# EAGLE board Adafruit-FunHouse (EAGLE 9.6.2)
REV: C
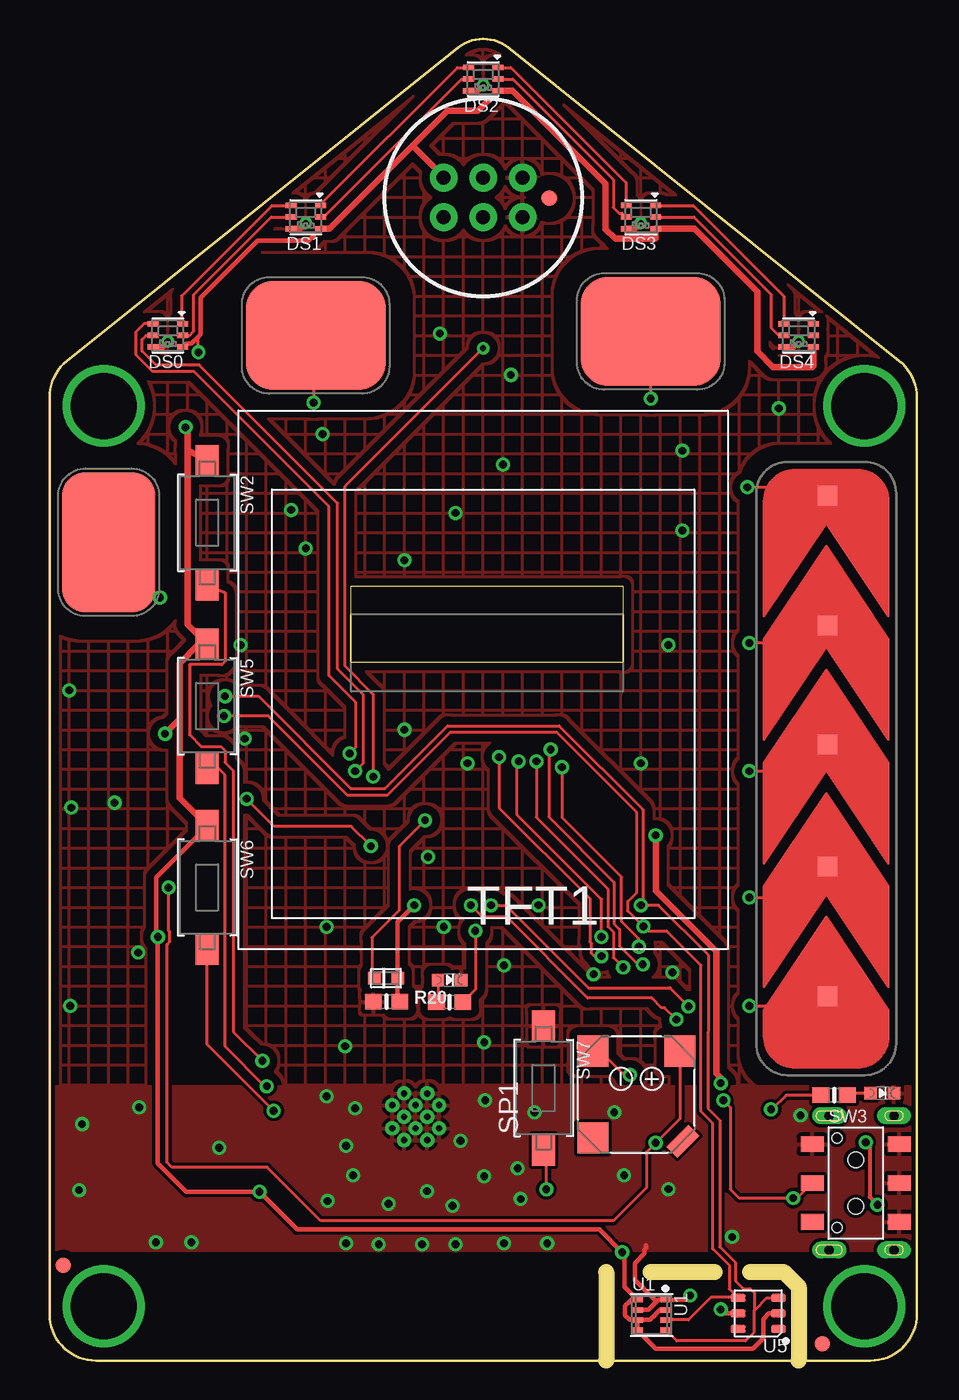
[diagram p0: board, top side]
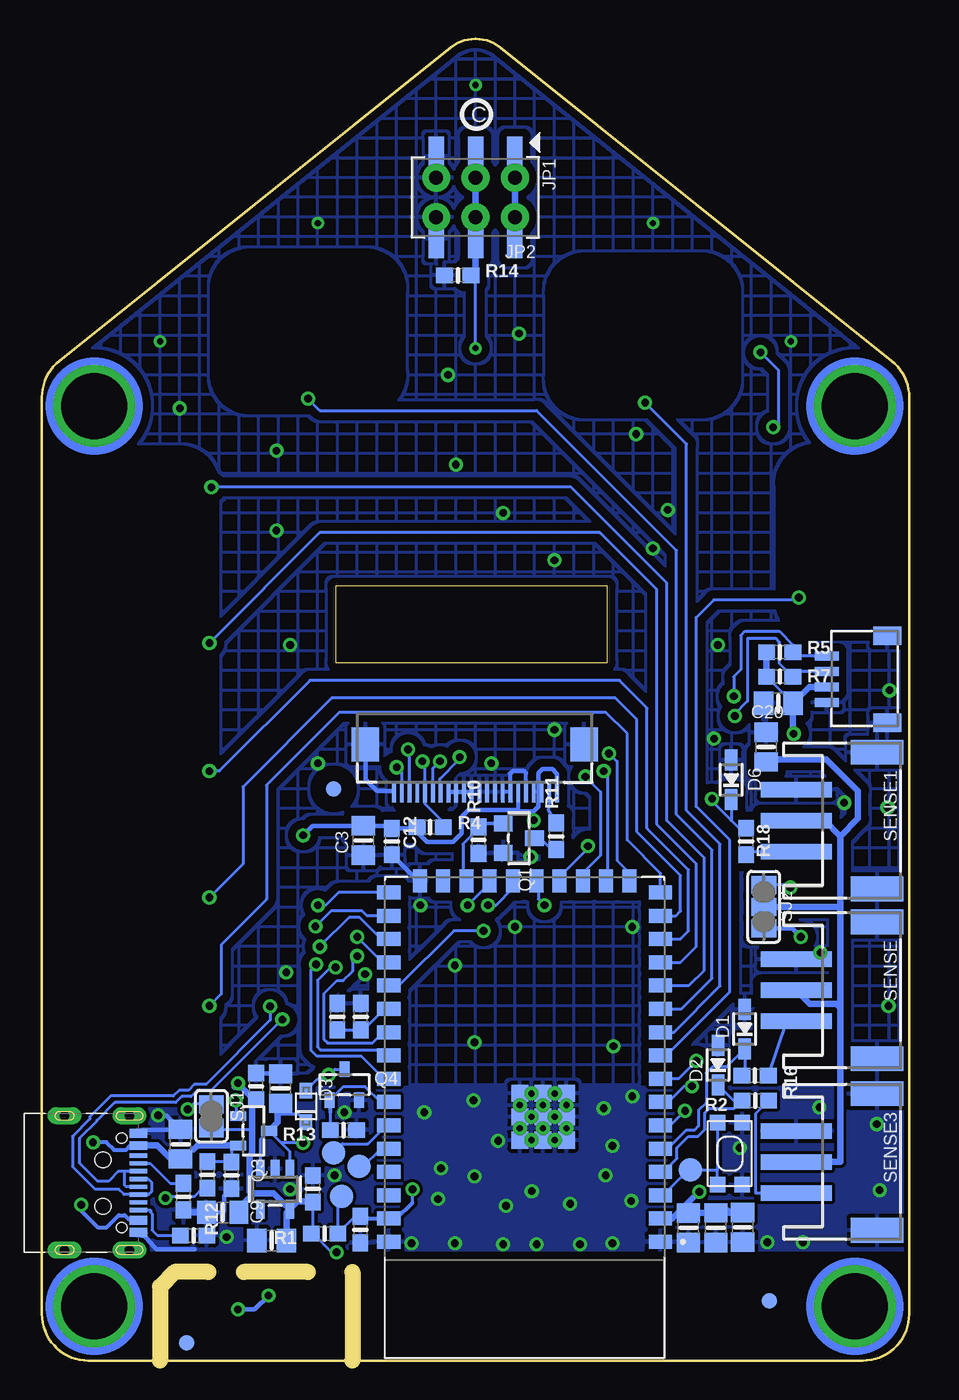
[diagram p1: board, bottom side, seen from below]

Size 55.88 x 85.15 mm. Coordinates in mm from the lower left corner, seen from the top.
Outline: 54.75,64.4 29.53,84.59 arc77 26.35,84.59 1.13,64.4 arc51 0,62.06 0,3 arc90 3,0 52.88,0 arc90 55.88,3 55.88,62.06 arc51 54.75,64.4
Outline: 19.43,49.91 36.96,49.91 36.96,44.96 19.43,44.96 19.43,49.91
Copper layers (1*16): Top 0.035mm / dielectric 1.5mm / Bottom 0.035mm
Design rules "adafruit *": minimum track width 8mil, minimum drill 15.5mil, track to track 8mil, track to pad 8mil, pad to pad 8mil, via to via 8mil, smd to smd 8mil, copper to edge 10mil, drill to drill 8mil, minimum pad ring 10mil, minimum via ring 8mil, stop-mask expansion 2mil, vias tented up to drill 20mil, thermal gap 10mil
Net classes: 1 power: width 0.305 mm; 2 lowpower: width 0.305 mm, drill 0.483 mm
Milling: 5 lines

## Footprints (pad centres in the part's own frame; a part is rotated, then mirrored left to right if it is on the bottom)
0805-NO = smd 1.24 x 1.5: 1 -0.95,0; 2 0.95,0
0603-NO = smd 1.075 x 1: 1 -0.85,0; 2 0.85,0
0805_10MGAP = smd 1.2 x 1.5: 1 -1.05,0; 2 1.05,0
JST_SH4 = smd 0.6 x 1.55: 1 -1.5,2.514; 2 -0.5,2.514; 3 0.5,2.514; 4 1.5,2.514 | smd 1.2 x 1.8: MT1 -2.8,-1.386; MT2 2.8,-1.386
SOD-323 = smd 1.35 x 0.8: A 1.27,0; C -1.27,0
SOD-323F = smd 1 x 0.8: A -1,0; C 1,0
APA102_2020 = smd 0.7 x 0.35: 1 -0.95,-0.75; 2 -0.95,0; 3 -0.95,0.75; 4 0.95,0.75; 5 0.95,0; 6 0.95,-0.75
FIDUCIAL_1MM = smd 1 x 1: 1 0,0
2X03_SMT_4UCON_14113 = smd 1 x 2.5: 1 -2.54,-2.665; 2 -2.54,2.665; 3 0,-2.665; 4 0,2.665; 5 2.54,-2.665; 6 2.54,2.665
2X03_SMTTHM = smd 1 x 2.5: 1 -2.54,-2.665; 2 -2.54,2.665; 3 0,-2.665; 4 0,2.665; 5 2.54,-2.665; 6 2.54,2.665 | drill 0.9 pad 1.778: T1 -2.54,-1.27; T2 -2.54,1.27; T3 0,-1.27; T4 0,1.27; T5 2.54,-1.27; T6 2.54,1.27
CHIPLED_0603_NOOUTLINE = smd 0.8 x 0.8: A 0,-0.75; C 0,0.75
SOT23-WIDE = smd 1 x 1.2: 1 -0.95,-1; 2 0.95,-1; 3 0,1
SOT23-R = smd 0.635 x 1.016: 1 -0.95,-1; 2 0.95,-1; 3 0,1
JSTPH3 = smd 1 x 4.6: 1 -2,-2.7; 2 0,-2.7; 3 2,-2.7 | smd 1.6 x 3.4: NC1 -4.4,2.5; NC2 4.4,2.5
SOLDERJUMPER_CLOSEDWIRE = smd 1.168 x 1.6: 1 -0.762,0; 2 0.762,0 | smd 0.635 x 0.203: WIRE 0,0
SOLDERJUMPER_2WAY_OPEN_NOPASTE = smd 1.168 x 1.6: 1 -1.397,0; 2 0,0; 3 1.397,0
BUZZER_SMT_7.5MM = smd 2 x 2: + 2.8,-2.8; - 2.8,2.8; MT2 -2.8,2.8 | smd 2 x 1 rotated 135: MT -3,-3
TACTILE_3X6MM = smd 2 x 1.5: P$1 -4,0; P$2 4,0
EG1390 = smd 1 x 1.5: O1 -2.5,2.8; O2 -2.5,-2.8; P1 0,2.8; P2 0,-2.8; S1 2.5,2.8; S2 2.5,-2.8 | hole 1: 1.5,0; -1.5,0
KMR2 = smd 1 x 1: 1 2,0.8; 2 2,-0.8; 3 -2,0.8; 4 -2,-0.8
TFT_1.54IN_240X240_22PIN = smd 0.25 x 1.4 bottom: 1 5.25,2.722; 2 4.75,2.722; 3 4.25,2.722; 4 3.75,2.722; 5 3.25,2.722; 6 2.75,2.722; 7 2.25,2.722; 8 1.75,2.722; 9 1.25,2.722; 10 0.75,2.722; 11 0.25,2.722; 12 -0.25,2.722; 13 -0.75,2.722; 14 -1.25,2.722; 15 -1.75,2.722; 16 -2.25,2.722; 17 -2.75,2.722; 18 -3.25,2.722; 19 -3.75,2.722; 20 -4.25,2.722; 21 -4.75,2.722; 22 -5.25,2.722 | smd 1.8 x 2.2 bottom: SUPPORT1 7,-0.328; SUPPORT2 -7.1,-0.328
TESTPOINT_ROUND_1.5MM_NO = smd 1.5 x 1.5: P$1 0,0
SMT_NUT_3MM = drill 4.25 pad 4.572: P$1 0,0
BMX280_COMBO = smd 0.725 x 0.35: 1 0.925,0.975; 2 0.925,0.325; 3 0.925,-0.325; 4 0.925,-0.975; 5 -0.925,-0.975; 6 -0.925,-0.325; 7 -0.925,0.325; 8 -0.925,0.975
ALS-PT19-315C = smd 0.8 x 0.8: C -0.75,0; E 0.75,0
MODULE_ESP32-S2-WROVER = smd 1.5 x 0.9: 1 -8.75,8; 2 -8.75,6.5; 3 -8.75,5; 4 -8.75,3.5; 5 -8.75,2; 6 -8.75,0.5; 7 -8.75,-1; 8 -8.75,-2.5; 9 -8.75,-4; 10 -8.75,-5.5; 11 -8.75,-7; 12 -8.75,-8.5; 13 -8.75,-10; 14 -8.75,-11.5; 15 -8.75,-13; 16 -8.75,-14.5; 27 8.75,-14.5; 28 8.75,-13; 29 8.75,-11.5; 30 8.75,-10; 31 8.75,-8.5; 32 8.75,-7; 33 8.75,-5.5; 34 8.75,-4; 35 8.75,-2.5; 36 8.75,-1; 37 8.75,0.5; 38 8.75,2; 39 8.75,3.5; 40 8.75,5; 41 8.75,6.5; 42 8.75,8 | smd 0.9 x 1.5: 17 -6.75,-15.25; 18 -5.25,-15.25; 19 -3.75,-15.25; 20 -2.25,-15.25; 21 -0.75,-15.25; 22 0.75,-15.25; 23 2.25,-15.25; 24 3.75,-15.25; 25 5.25,-15.25; 26 6.75,-15.25 | smd 1.1 x 1.1: 43_1 -2.69,1.45; 43_2 -1.19,1.45; 43_3 0.31,1.45; 43_4 -2.69,-0.05; 43_5 -1.19,-0.05; 43_6 0.31,-0.05; 43_7 -2.69,-1.55; 43_8 -1.19,-1.55; 43_9 0.31,-1.55 | drill 0.4: 43_10 -1.94,1.45; 43_11 -0.44,1.45; 43_12 -2.69,0.7; 43_13 -1.19,0.7; 43_14 0.31,0.7; 43_15 -1.94,-0.05; 43_16 -0.44,-0.05; 43_17 -2.69,-0.8; 43_18 -1.19,-0.8; 43_19 0.31,-0.8; 43_20 -1.94,-1.55; 43_21 -0.44,-1.55
SOT23-5 = smd 0.55 x 1.2: 1 -0.95,-1.3; 2 0,-1.3; 3 0.95,-1.3; 4 0.95,1.3; 5 -0.95,1.3
SNR6-1.0-3X3X1MM = smd 0.95 x 0.5: 1 -1.3,1; 2 -1.3,0; 3 -1.3,-1; 4 1.3,-1; 5 1.3,0; 6 1.3,1
CAPTOUCH_6X9MM = smd 9 x 6: P$1 0,0
CAPTOUCH_7X9MM = smd 9 x 7: P$1 0,0
USB_C_CUSB31-CFM2AX-01-X = smd 0.575 x 1.15: A1B12 -3.2,3.545; A4B9 -2.4,3.545; B1A12 3.2,3.545; B4A9 2.4,3.545 | smd 0.275 x 1.15: A5 -1.25,3.545; A6 -0.25,3.545; A7 0.25,3.545; A8 1.25,3.545; B5 1.75,3.545; B6 0.75,3.545; B7 -0.75,3.545; B8 -1.75,3.545 | drill 0.6 pad 1 long: M1 -4.32,2.97; M2 4.32,2.97; M3 -4.32,-1.21; M4 4.32,-1.21 | hole 0.65: 2.89,2.47; -2.89,2.47
CAPTOUCH_5SLIDER = smd 1.27 x 1.27: P$1 0.08,-16.42; P$2 0.08,-8.07; P$3 0.08,-0.18; P$4 0.08,7.44; P$5 0.08,15.83

## Placement (x,y rotation side)
C1  10uF  [0805-NO]  46.95,13.95 90 bottom
C2  0.1uF  [0603-NO]  42.08,17.67 90 bottom
C3  10µF  [0805-NO]  35.17,33.5 270 bottom
C4  10µF  [0805-NO]  12.46,8.57 270 bottom
C5  0.1uF  [0603-NO]  38.42,11.07 90 bottom
C6  1uF  [0603-NO]  35.34,22.16 90 bottom
C7  10µF  [0805-NO]  8.43,42.35 180 bottom
C9  10uF/10V+  [0805_10MGAP]  44.23,9.55 0 bottom
C10  10µF  [0805-NO]  10.73,8.59 270 bottom
C11  10µF  [0805-NO]  40.5,17.53 90 bottom
C12  1uF  [0603-NO]  33.32,33.44 270 bottom
C13  10µF  [0805-NO]  14.23,8.56 270 bottom
C14  1uF  [0603-NO]  35.36,8.45 270 bottom
C15  0.1uF  [0603-NO]  43.67,11.94 270 bottom
C17  10µF  [0805-NO]  41.07,7.75 180 bottom
C20  10uF  [0805-NO]  9.22,39.52 90 bottom
CONN1  STEMMA_I2C_QT  [JST_SH4]  2.81,43.89 90 bottom
D1  3.6V  [SOD-323]  10.6,21.36 90 bottom
D2  3.6V  [SOD-323]  12.32,19.05 90 bottom
D3  1N4148  [SOD-323F]  38.86,16.38 270 bottom
D6  3.6V  [SOD-323]  11.47,37.41 90 bottom
DS0  APA102-2020  [APA102_2020]  7.62,66.04 180 top
DS1  APA102-2020  [APA102_2020]  16.51,73.66 180 top
DS2  APA102-2020  [APA102_2020]  27.94,82.55 180 top
DS3  APA102-2020  [APA102_2020]  38.1,73.66 180 top
DS4  APA102-2020  [APA102_2020]  48.26,66.04 180 top
FID1  FIDUCIAL_1MM  [FIDUCIAL_1MM]  49.78,1.08 0 top
FID2  FIDUCIAL_1MM  [FIDUCIAL_1MM]  32.19,74.87 0 top
FID3  FIDUCIAL_1MM  [FIDUCIAL_1MM]  0.89,6.16 0 top
FID4  FIDUCIAL_1MM  [FIDUCIAL_1MM]  9.02,3.87 0 bottom
FID5  FIDUCIAL_1MM  [FIDUCIAL_1MM]  46.55,1.14 0 bottom
FID6  FIDUCIAL_1MM  [FIDUCIAL_1MM]  37.08,36.83 0 bottom
JP1  2x3 SMT  [2X03_SMT_4UCON_14113]  27.94,74.93 180 bottom
JP2  [2X03_SMTTHM]  27.94,74.93 180 bottom
L  RED  [CHIPLED_0603_NOOUTLINE]  25.78,24.52 270 top
ON  GREEN  [CHIPLED_0603_NOOUTLINE]  53.66,17.23 270 top
Q1  BSS138  [SOT23-WIDE]  25.15,33.66 270 bottom
Q3  DMG3415U-7  [SOT23-R]  42.24,14.81 270 bottom
Q4  BSS138  [SOT23-R]  36.39,17.78 0 bottom
R1  10K  [0603-NO]  37.67,8.19 180 bottom
R2  1K  [0603-NO]  9.91,16.76 180 bottom
R3  5.1K  [0603-NO]  46.1,8.07 180 bottom
R4  10K  [0603-NO]  30.86,34.35 0 bottom
R5  10K  [0603-NO]  8.34,45.64 0 bottom
R6  47K  [0603-NO]  50.55,17.11 180 top
R7  10K  [0603-NO]  8.34,44.07 0 bottom
R8  5.1K  [0603-NO]  46.75,10.57 90 bottom
R9  10K  [0603-NO]  25.78,23.1 0 top
R10  10K  [0603-NO]  27.75,33.53 90 bottom
R11  100  [0603-NO]  22.73,33.78 90 bottom
R12  10K  [0603-NO]  45.21,11.98 270 bottom
R13  10K  [0603-NO]  36.45,14.86 180 bottom
R14  1Meg  [0603-NO]  29.08,69.91 0 bottom
R16  1K  [0603-NO]  9.93,18.35 180 bottom
R17  1Meg  [0603-NO]  36.86,22.16 270 bottom
R18  1K  [0603-NO]  10.5,33.45 90 bottom
R20  10K  [0603-NO]  21.72,23.11 0 top
SENSE  JST PH 3  [JSTPH3]  4.57,23.86 270 bottom
SENSE1  JST PH 3  [JSTPH3]  4.57,34.79 270 bottom
SENSE3  JST PH 3  [JSTPH3]  4.57,12.8 270 bottom
SJ1  [SOLDERJUMPER_CLOSEDWIRE]  44.96,15.75 270 bottom
SJ2  [SOLDERJUMPER_2WAY_OPEN_NOPASTE]  9.38,29.24 270 bottom
SP1  7.5mm SPK  [BUZZER_SMT_7.5MM]  37.81,17.14 90 top
SW2  FSM2JMTR  [TACTILE_3X6MM]  10.16,53.98 270 top
SW3  EG1390  [EG1390]  51.94,11.45 270 top
SW4  SPST_TACT-KMR2  [KMR2]  11.56,13.34 270 bottom
SW5  FSM2JMTR  [TACTILE_3X6MM]  10.16,42.16 270 top
SW6  FSM2JMTR  [TACTILE_3X6MM]  10.16,30.48 270 top
SW7  FSM2JMTR  [TACTILE_3X6MM]  31.83,17.57 270 top
TFT1  DISP_TFT_1.54IN_240X240_22P  [TFT_1.54IN_240X240_22PIN]  27.94,39.37 180 top
TP1  [TESTPOINT_ROUND_1.5MM_NO]  14.1,12.31 180 bottom
TP2  [TESTPOINT_ROUND_1.5MM_NO]  35.43,12.51 0 bottom
TP3  [TESTPOINT_ROUND_1.5MM_NO]  37.08,13.4 0 bottom
TP4  SEWTAP_SMTNUTM3  [SMT_NUT_3MM]  3.5,3.5 0 bottom
TP5  SEWTAP_SMTNUTM3  [SMT_NUT_3MM]  52.5,3.5 0 bottom
TP6  [TESTPOINT_ROUND_1.5MM_NO]  36.58,10.59 270 bottom
TP7  SEWTAP_SMTNUTM3  [SMT_NUT_3MM]  3.5,61.5 0 bottom
TP8  SEWTAP_SMTNUTM3  [SMT_NUT_3MM]  52.5,61.5 0 bottom
U1  DPS3  [BMX280_COMBO]  38.79,2.95 0 top
U2  ALS-PT19  [ALS-PT19-315C]  21.68,24.64 0 top
U3  ESP32-S2-MODULE_WROVER  [MODULE_ESP32-S2-WROVER]  24.78,15.66 180 bottom
U4  AP2112K-3.3  [SOT23-5]  40.85,11.05 180 bottom
U5  AHT20  [SNR6-1.0-3X3X1MM]  45.66,3.05 180 top
U$41  [PCBFEAT-REV-040]  27.88,80.26 0 bottom
U$45  [FUNHOUSE_FRONT]  0,0 0 top
U$69  [FUNHOUSE_BACK]  55.88,0 0 bottom
X1  CAPTOUCH_10MM  [CAPTOUCH_6X9MM]  3.81,52.72 90 top
X3  CAPTOUCH_10MM  [CAPTOUCH_7X9MM]  17.14,66.04 0 top
X4  USB C  [USB_C_CUSB31-CFM2AX-01-X]  53.2,11.46 270 bottom
X5  CAPTOUCH_10MM  [CAPTOUCH_7X9MM]  38.73,66.29 0 top
X6  CAPTOUCH_5SLIDER_10MM  [CAPTOUCH_5SLIDER]  50.04,39.89 0 top

## Library data of the parts
C1-C7 C9-C15 C17 C20 CONN1 D1 D2 D6 DS0 DS1-DS4 JP1 L ON Q1 Q3 Q4 R1-R14 R16-R18 R20 SJ1 SJ2 SP1 SW7 TP1-TP3 TP6 U2 U4 = microbuilder
D3 SW4 = adafruit
FID1-FID6 = microbuilder; BOM: EXCLUDE
JP2 SENSE SENSE1 SENSE3 SW2 SW3 SW5 SW6 TP4 TP5 TP7 TP8 X1 X3-X6 = adafruit_electromech
TFT1 = adafruit_display
U1 = adafruit_sensor
U3 = adafruit_wireless; AVAILABILITY: Warning; DESCRIPTION: WiFi 802.11b/g/n Transceiver Module 2.4GHz Antenna Not Included Surface Mount; DIGIKEY-PURCHASE-URL: https://snapeda.com/shop?store=DigiKey&id=4614060; MF: Espressif Systems; MP: ESP32-S2-WROVER; PACKAGE: VFQFN-56 Espressif Systems; PRICE: None
U5 = Longan-IC
U$41 = microbuilder; REV: C
U$45 U$69 = portal_silks

## Nets
3.3V: C2.1 C3.1 C4.1 C5.1 C7.1 C9.2 C10.1 C12.1 C13.1 C17.1 CONN1.2 DS0.3 DS1.3 DS2.3 DS3.3 DS4.3 JP1.1 JP1.2 JP2.1 JP2.2 JP2.T1 JP2.T2 R1.2 R4.1 R5.1 R7.1 SJ1.2 SJ2.3 SW2.P$1 SW5.P$1 SW6.P$1 TFT1.1 TFT1.3 TFT1.4 TFT1.6 U1.2 U1.5 U1.6 U1.8 U2.C U3.2 U4.5 U5.2
A0_JST: R18.1 SENSE1.3
A2_JST2: R2.1 SENSE3.3
AD0: D6.C R18.2 U3.20
AD1: D1.C R16.2 U3.5
AD1_JST: R16.1 SENSE.3
AD2: D2.C R2.2 U3.4
BOOT0: SW4.2 SW4.4 TP1.P$1 U3.3
BUTTON_DOWN: SW6.P$2 U3.6
BUTTON_SEL: SW5.P$2 U3.7
BUTTON_UP: SW2.P$2 U3.8
CC1: R8.2 X4.A5
CC2: R3.2 X4.B5
CT6: U3.9 X1.P$1
CT7: U3.10 X3.P$1
CT8: U3.11 X5.P$1
CT9: U3.12 X6.P$5
CT10: U3.13 X6.P$4
CT11: U3.14 X6.P$3
CT12: U3.15 X6.P$2
CT13: U3.16 X6.P$1
D+: U3.23 X4.A6 X4.B6
D-: U3.22 X4.A7 X4.B7
DS_CLK: DS0.5 U3.18
DS_DATA: DS0.6 U3.17
EN: Q3.1 R12.2 SW3.P2
GND [lowpower]: C1.2 C2.2 C3.2 C4.2 C5.2 C6.2 C7.2 C9.1 C10.2 C11.2 C12.2 C13.2 C14.2 C15.2 C17.2 C20.2 CONN1.1 CONN1.MT1 CONN1.MT2 D1.A D2.A D6.A DS0.4 DS1.4 DS2.4 DS3.4 DS4.4 JP1.5 JP1.6 JP2.5 JP2.6 JP2.T5 JP2.T6 L.C ON.C Q1.2 Q4.2 R3.1 R8.1 R10.1 R13.1 R14.1 R17.1 R20.1 SENSE1.1 SENSE1.NC1 SENSE1.NC2 SENSE3.1 SENSE3.NC1 SENSE3.NC2 SENSE.1 SENSE.NC1 SENSE.NC2 SW3.O1 SW3.O2 SW3.P1 SW3.S1 SW4.1 SW4.3 SW7.P$1 TFT1.5 TFT1.7 TFT1.8 TFT1.9 TFT1.10 TFT1.11 TFT1.12 TFT1.13 TFT1.14 TFT1.15 TFT1.22 TFT1.SUPPORT1 TFT1.SUPPORT2 U1.1 U1.7 U3.1 U3.26 U3.42 U3.43_1 U3.43_2 U3.43_3 U3.43_4 U3.43_5 U3.43_6 U3.43_7 U3.43_8 U3.43_9 U3.43_10 U3.43_11 U3.43_12 U3.43_13 U3.43_14 U3.43_15 U3.43_16 U3.43_17 U3.43_18 U3.43_19 U3.43_20 U3.43_21 U4.2 U5.5 X4.A1B12 X4.B1A12
IO38_DOUBLETAP: C6.1 R17.2 U3.32
LIGHT: R20.2 U2.E U3.21
MISO: R9.2 U3.31
MOSI: TFT1.21 U3.29
N$1: L.A R9.1
N$2: R6.2 SJ1.1
N$3: ON.A R6.1
N$5: D3.A Q4.3 SP1.-
N$10: DS0.1 DS1.6
N$11: DS0.2 DS1.5
N$12: DS1.1 DS2.6
N$14: DS1.2 DS2.5
N$15: DS2.1 DS3.6
N$17: DS2.2 DS3.5
N$24: DS3.1 DS4.6
N$25: DS3.2 DS4.5
N$99: Q1.3 R11.1
PIR_SENSE: JP1.3 JP1.4 JP2.3 JP2.4 JP2.T3 JP2.T4 R14.2 U3.19
RESET: C14.1 R1.1 SW7.P$2 TP6.P$1 U3.41
RXD0: TP2.P$1 U3.38
SCK: TFT1.17 U3.30
SCL: CONN1.4 R5.2 U1.4 U3.27 U5.3
SDA: CONN1.3 R7.2 U1.3 U3.28 U5.4
SPKR: Q4.1 R13.2 U3.36
TFT_CS: R4.2 TFT1.18 U3.34
TFT_DC: TFT1.16 U3.33
TFT_LEDK: R11.2 TFT1.2
TFT_LITE: Q1.1 R10.2 U3.24
TFT_RESET: TFT1.20 U3.35
TXD0: TP3.P$1 U3.37
VBUS: C1.1 C15.1 Q3.2 R12.1 X4.A4B9 X4.B4A9
VCC [power]: C20.1 SENSE1.2 SENSE3.2 SENSE.2 SJ2.2
VHIGH: C11.1 D3.C Q3.3 SJ2.1 SP1.+ U4.1 U4.3

## Tracks (layer width: path | path; a pad name or v marks a point on that pad's centre or on a via)
3.3V  (via drill 0.48, 0.5)
  Top 0.203: v9.59,64.96 9.59,65.91 9.56,65.94 | U2.C 20.77,24.8 20.77,27.25 22.54,29.03 22.54,33.15 v24.19,34.8
  Top 0.305: U1.6 U1.5 39.07,0.76 45.3,0.76 45.97,1.43 45.97,2.67 46.35,3.05 U5.2 | U1.6 38.69,2.62 38.99,2.92 38.99,2.94 39.32,3.27 U1.2 | U1.8 37.67,4.11 | 37.67,4.11 37.03,4.75 37.03,6.84 v36.89,6.99 35.42,8.46 15.94,8.46 v13.53,10.87 8.81,10.87 6.99,12.7 v6.99,27.3 6.86,27.43 6.86,31.11 10.16,34.42 SW6.P$1 | DS0.3 8.79,65.51 9.13,65.51 9.56,65.94 9.75,66.13 9.75,68.48 13.41,72.14 16.69,72.14 DS1.3 | U1.6 37.38,2.62 37.08,2.92 37.08,3.54 37.35,3.8 37.36,3.8 37.67,4.11
  Top 0.406: 8.89,58.67 8.89,60.01 v8.76,60.13 | 8.89,58.67 8.95,58.61 SW2.P$1 | 8.89,58.67 8.89,47.43 SW5.P$1 9.62,46.16 8.38,44.92 8.38,41.33 | SW6.P$1 8.38,36.26 8.38,41.33 | v7.44,40.39 8.38,41.33 | v43.24,17.87 43.24,18.22 42.95,18.52 42.95,26.35 39.05,30.25 v39.05,33.85 | DS4.3 49.21,64.07 49.15,64.01 46.61,64.01 45.59,65.02 45.59,68.86 41.55,72.91 DS3.3 39.05,72.26 36.45,72.26 35.81,72.9 35.81,75.82 29.83,81.8 DS2.3 27.61,80.52 25.65,80.52 23.4,78.26 | DS1.3 18.05,72.91 23.4,78.26 | 23.4,78.26 25.4,76.26 JP2.T1
  Bottom 0.203: C5.1 38.42,8.29 R1.2 38.42,8.19 37.21,6.99 v36.89,6.99 | C7.1 R7.1 | 42.33,14.86 44.2,14.86 44.32,14.73 44.7,14.73 SJ1.2 | TFT1.3 23.88,36.65 TFT1.4 | v8.76,60.13 8.45,60.13 8.45,63.82 v9.59,64.96 | v24.19,34.8 24.19,35.37
  Bottom 0.254: TFT1.6 25.19,35.48
  Bottom 0.305: v6.99,27.3 7.52,27.84 SJ2.3 | TFT1.1 22.69,37.8 22.99,38.1 23.62,38.1 23.88,37.85 23.88,36.65 23.88,35.69 24.19,35.37 25.08,35.37 25.19,35.48 28.38,35.48 28.83,35.03 28.83,33.97 29.4,33.4 31.05,33.4 31.82,34.17 31.82,34.25 | 31.82,34.25 31.86,34.29 C12.1 33.49,34.45 C3.1 38.45,34.45 v39.05,33.85 | 31.82,34.25 31.67,34.1 R4.1
  Bottom 0.406: C10.1 11.59,9.54 11.73,9.68 11.89,9.52 C4.1 C13.1 14.23,10.21 13.56,10.87 v13.53,10.87 13.55,10.87 15.27,9.16 U3.2 | CONN1.2 6.45,43.39 C7.1 7.48,40.43 v7.44,40.39 | R5.1 R7.1 | U4.5 39.4,10.26 38.45,10.26 C5.1 | v43.24,17.87 43.46,17.65 43.04,17.65 42.2,16.82 C2.1 42.33,16.57 42.33,14.86 42.33,13.37 42.48,13.21 42.48,10.86 42.42,10.79 42.23,10.79 | U4.5 40.12,9.53 C17.1 | U4.5 40.95,10.79 42.23,10.79 | C9.2 43.18,9.84 42.23,10.79 | JP2.1 JP2.T1 | JP2.1 JP2.T2 | JP2.1 JP2.2
A0_JST
  Bottom 0.203: R18.1 10.31,32.79 SENSE1.3
A2_JST2
  Bottom 0.203: R2.1 9.91,15.91 9.91,10.8 SENSE3.3
AD0  (via drill 0.5)
  Top 0.203: v20.7,33.15 19.43,34.42 14.48,34.42 v12.7,36.2
  Bottom 0.203: R18.2 10.97,34.3 12.78,36.11 v12.7,36.2 | D6.C 11.47,34.8 10.88,34.21 | v20.7,33.15 20.7,32.99 22.53,31.16 U3.20
  Bottom 0.305: R18.2 10.78,34.3 10.88,34.21
AD1
  Bottom 0.203: U3.5 15.57,13.66 14.38,14.85 13.83,14.85 13.57,15.11 13.57,16.13 13.08,16.62 13.08,18.52 12.68,18.92 11.77,18.92 D1.C 10.6,18.56 R16.2
AD1_JST
  Bottom 0.203: R16.1 7.88,21.86 SENSE.3
AD2
  Bottom 0.203: U3.4 15.9,12.29 15.72,12.29 14.96,13.04 14.96,13.7 14.22,14.44 13.63,14.44 13.16,14.9 13.16,15.96 12.87,16.26 11.26,16.26 10.78,16.74 | 10.78,16.74 R2.2 | D2.C 11.28,16.74 10.78,16.74
BOOT0
  Bottom 0.203: U3.3 15.88,10.66 14.24,12.31 TP1.P$1 12.36,12.31 | SW4.4 12.36,12.31 | SW4.2 12.36,12.31
BUTTON_DOWN  (via drill 0.5)
  Top 0.203: v14.44,16.09 10.17,20.37 SW6.P$2
  Bottom 0.203: U3.6 15.38,15.16 v14.44,16.09
BUTTON_SEL  (via drill 0.5)
  Top 0.203: v14,17.68 13.93,17.62 11.3,20.25 11.3,37.72 10.14,38.88 SW5.P$2
  Bottom 0.203: U3.7 15.53,16.66 14.51,17.68 v14,17.68
BUTTON_UP  (via drill 0.5)
  Top 0.203: SW2.P$2 11.3,49.47 11.3,45.02 11.11,44.83 9.02,44.83 9.02,40.32 9.78,39.56 11.05,39.56 11.3,39.31 11.3,38.55 11.84,38.01 11.84,21.18 v13.72,19.3
  Bottom 0.203: v13.72,19.3 14.86,18.16 U3.8
CC1
  Bottom 0.203: X4.A5 48.89,12.71 47.6,11.42 R8.2
CC2
  Bottom 0.203: R3.2 48.44,8.07 48.78,8.41 48.78,9.47 48.88,9.57 48.88,9.71 X4.B5
CT6  (via drill 0.5)
  Top 0.203: X1.P$1 3.81,52.45 v7.11,49.15
  Bottom 0.203: U3.9 15.65,19.66 11.56,23.75 11.56,33.53 13.72,35.69 13.72,47.88 12.59,49.01 7.26,49.01
  Bottom 0.254: v7.11,49.15 v7.12,49.15 7.26,49.01
CT7  (via drill 0.5)
  Top 0.203: v17.02,61.72 17.02,65.91 X3.P$1
  Bottom 0.203: U3.10 15.16,21.16 12.19,24.13 12.19,33.27 14.35,35.43 14.35,59.05 v17.02,61.72
CT8  (via drill 0.5)
  Top 0.203: v38.73,61.98 X5.P$1
  Bottom 0.203: U3.11 14.68,22.66 12.7,24.64 12.7,32.89 14.99,35.18 14.99,52.2 24,61.21 37.97,61.21 v38.73,61.98
CT9  (via drill 0.5)
  Top 0.203: v44.96,56.26 49.25,56.26 X6.P$5
  Bottom 0.203: U3.12 14.2,24.16 13.21,25.15 13.21,32.38 15.62,34.8 15.62,50.1 21.78,56.26 v44.96,56.26
CT10  (via drill 0.5)
  Top 0.203: X6.P$4 48.94,46.23 v45.09,46.23
  Bottom 0.203: U3.13 14.73,25.66 13.72,26.67 13.72,32 16.26,34.54 16.26,49.66 19.94,53.34 37.97,53.34 v45.09,46.23
CT11  (via drill 0.5)
  Top 0.203: v45.09,37.97 46.86,37.97 48.35,39.46 X6.P$3
  Bottom 0.203: U3.14 14.75,27.16 14.22,27.69 14.22,31.62 16.89,34.29 16.89,42.04 18.67,43.81 38.61,43.81 44.45,37.97 v45.09,37.97
CT12  (via drill 0.5)
  Top 0.203: v45.09,29.84 48.05,29.84 X6.P$2
  Bottom 0.203: U3.15 15.03,28.66 14.73,28.96 14.73,31.24 17.55,34.06 17.55,41.3 18.92,42.67 37.21,42.67 42.93,36.96 42.93,32 v45.09,29.84
CT13  (via drill 0.5)
  Top 0.203: v45.09,22.86 46.99,22.86 47.88,21.97 49.44,23.47 X6.P$1
  Bottom 0.203: U3.16 16.03,31.39 18.16,33.53 18.16,40.39 19.56,41.78 36.7,41.78 41.4,37.08 41.4,29.72 44.32,26.8 44.32,23.62 v45.09,22.86
D+  (via drill 0.5)
  Top 0.203: v41.17,22.83 39.97,24.03 34.71,24.03 29.4,29.34 v28.45,29.34
  Bottom 0.203: v28.45,29.34 27.03,30.76 U3.23 | v41.17,22.83 41.17,21.94 45.31,17.8 46.05,17.8 46.43,17.42 47.03,17.42 47.41,17.04 51.45,17.04 52.79,15.71 52.79,15.56 53.9,14.45 53.9,12.5 52.45,11.05 50.93,11.05 50.58,10.71 X4.B6 48.98,10.71 48.78,10.91 48.78,11.47 48.96,11.65 48.99,11.65 49.04,11.71 X4.A6
D-  (via drill 0.5)
  Top 0.203: v40.39,21.97 39.62,22.73 39.43,22.73 38.8,23.37 34.67,23.37 29.46,28.57 27.91,28.57 v27.14,29.34
  Bottom 0.203: v27.14,29.34 26.64,29.34 25.53,30.45 U3.22 | 49.97,12.21 50.55,12.21 | 50.55,12.21 50.95,12.21 51.59,11.57 52.3,11.57 53.43,12.7 53.43,14.35 52.32,15.46 52.32,15.49 51.18,16.64 47.24,16.64 46.86,17.02 46.27,17.02 45.88,17.4 44.96,17.4 v40.39,21.97 | X4.A7 50.45,11.21 50.55,11.3 50.55,12.21
  Bottom 0.254: X4.B7 49.97,12.21
DS_CLK  (via drill 0.5)
  Top 0.203: v19.68,37.97 20.19,38.48 20.19,42.93 18.54,44.58 18.54,55.24 9.65,64.14 6.86,64.14 5.97,65.02 5.97,65.79 6.22,66.04 DS0.5
  Bottom 0.203: U3.18 19.53,31.42 19.43,31.32 19.43,37.72 v19.68,37.97
DS_DATA  (via drill 0.5)
  Top 0.203: v19.34,39.12 19.72,39.5 19.72,42.42 18.01,44.13 18.01,55.02 9.3,63.73 6.63,63.73 5.56,64.79 5.56,66.27 6.08,66.79 DS0.6
  Bottom 0.203: v19.34,39.12 18.83,38.61 18.83,32.22 18.03,31.42 U3.17
EN  (via drill 0.48, 0.5)
  Top 0.203: v43.41,16.76 43.85,16.32 43.85,11.05 44.42,10.48 v47.92,10.48 48.18,10.48 SW3.P2
  Bottom 0.203: Q3.1 43.37,15.88 43.37,16.72 v43.41,16.76 | R12.2 45.52,11.13 46.08,10.56 47.83,10.56 v47.92,10.48
GND  (via drill 0.4, 0.48, 0.5)
  Top 0.305: v43.24,3.3 43.5,3.05 U5.5 | v41.27,4.19 41.02,3.94 39.73,3.94 U1.1 39.23,3.92 39.02,3.71 | U1.7 38.58,3.27 39.02,3.71 | 39.02,3.71 39.02,3.9 37.72,5.21 37.72,6.29 38.34,6.9 38.34,7.16 38.42,7.24 38.42,7.43
  Top 0.406: DS0.4 7.25,65.29 v7.62,65.66 | DS1.4 16.14,72.91 v16.51,73.28 | DS2.4 27.57,81.8 v27.94,82.17 | DS3.4 37.73,72.91 v38.1,73.28 | DS4.4 47.89,65.29 v48.26,65.66
  Bottom 0.254: TFT1.7 TFT1.8 | TFT1.5 24.69,37.83 | 25.72,37.78 25.72,36.67
  Bottom 0.305: TFT1.15 TFT1.14 TFT1.13 TFT1.12 | TFT1.22 33.24,36.7 34.29,36.7 35.04,37.45 TFT1.SUPPORT2 | X4.A1B12 49.45,14.87 46.98,14.87 C1.2 47.86,15.81 v48.39,15.81 | C2.2 40.54,18.52 C11.2 | U3.26 31.64,30.91 C12.2 | X4.B1A12 49.45,8.04 49.3,8.04 48.77,7.51 48.77,7.47 48.47,7.17 46.05,7.17 | 45.25,7.96 R3.1 | 44.64,8.91 C9.1 44.23,9.55 44.14,9.65 44.14,10.45 44.13,10.46 44.13,10.62 C15.2 | v43.24,3.3 42.16,3.3 v41.27,4.19 | 25.72,37.78 25.53,37.97 24.83,37.97 24.69,37.83 | 25.72,36.67 TFT1.7
  Bottom 0.406: R8.1 46.59,9.55 C9.1 45.24,9.55
  other vias: 29.21,57.72 40.77,53.47 26.16,54.61 22.86,51.56 39.88,46.1 22.86,40.64 38.1,38.48 1.91,10.99 9.14,7.62 6.86,7.62 19.11,7.56 21.21,7.49 24,7.49 26.16,7.49 29.27,7.56 32.07,7.56 30.35,10.41 25.97,9.97 21.84,10.1 19.56,11.94 17.91,10.29 19.11,13.84 19.68,16.26 17.84,17.02 24.32,10.92 28,11.87 30.16,12.38 31.24,16 28.07,16.76 26.48,14.16 10.92,13.72 5.78,16.32 37.02,11.94 43.98,7.97 39.88,11.05 36.39,16 12.57,40.07 12.32,46.1 16.51,52.32 29.72,63.5 25.15,66.17 46.99,61.34 31.5,29.34 24.38,32.45 26.92,38.48 40.13,25.02 5.71,26.29 4.19,35.94 1.27,43.18 15.56,54.8 17.59,59.69 40.77,58.61 28,20.51 19.05,20.26 17.84,27.94 29.27,25.46 25.4,27.94 35.05,24.89 2.1,15.24 1.33,22.86 1.4,35.62
  pour Top (isolate 0.508, hatched): 0,17.65 55.88,17.65 55.88,63.5 27.94,85.85 0,63.5
  pour Bottom (isolate 0.508, hatched): 0,17.78 55.88,17.78 55.88,63.5 27.94,85.85 0,63.5
  pour Bottom: 0,7.11 55.88,7.11 55.88,17.65 0,17.65
  pour Top: 0,7.11 55.88,7.11 55.88,17.65 0,17.65
IO38_DOUBLETAP
  Bottom 0.203: U3.32 33.81,22.66 35.15,21.31 C6.1 R17.2
LIGHT  (via drill 0.5)
  Top 0.305: R20.2 22.43,23.25 U2.E 22.43,28.27 v23.5,29.34
  Bottom 0.203: v23.5,29.34 23.9,29.74 23.9,30.78 U3.21
MISO  (via drill 0.5)
  Top 0.203: v27.43,27.69 27.43,23.9 R9.2
  Bottom 0.203: v27.43,27.69 29.34,27.69 32.86,24.16 U3.31
MOSI  (via drill 0.5)
  Top 0.203: v37.97,26.67 37.97,27.18 36.85,28.3 36.85,31.16 33.85,34.16 33.02,34.99 v33.02,38.23
  Bottom 0.203: U3.29 34.02,27.16 35.43,28.57 36.07,28.57 v37.97,26.67 | TFT1.21 32.69,37.9 v33.02,38.23
N$1
  Top 0.203: R9.1 25.03,23.2 L.A
N$2  (via drill 0.5)
  Top 0.203: R6.2 47.46,17.11 46.55,16.19 v46.48,16.19
  Bottom 0.203: v46.48,16.19 46.1,16.57 45.59,16.57 45.46,16.44 SJ1.1
N$3
  Top 0.203: ON.A 51.52,17.23 R6.1
N$4
  Bottom 0.406: 9.34,29.97 9.34,28.96
N$5  (via drill 0.5)
  Top 0.203: SP1.- 35.45,19.5 35.91,19.5 37.01,18.4 v37.4,18.4
  Bottom 0.203: D3.A 38.1,18.14 37.66,18.14 v37.4,18.4 37.02,18.78 Q4.3
N$10
  Top 0.203: DS0.1 8.51,66.85 8.51,68.58 14.34,74.41 DS1.6
N$11
  Top 0.203: DS0.2 9.02,66.04 9.3,66.32 9.3,68.67 14.29,73.66 DS1.5
N$12
  Top 0.203: DS1.1 17.46,74.48 26.28,83.3 DS2.6
N$14
  Top 0.203: DS1.2 17.67,73.66 26.56,82.55 DS2.5
N$15
  Top 0.203: DS2.1 29.73,83.3 37.15,75.88 DS3.6
N$17
  Top 0.203: DS2.2 29.84,82.55 36.32,76.07 36.32,74.28 36.67,73.93 36.88,73.93 DS3.5
N$24
  Top 0.203: DS3.1 41.47,74.41 47.31,68.57 DS4.6
N$25
  Top 0.203: DS3.2 41.52,73.66 46.48,68.69 46.48,66.55 46.99,66.04 DS4.5
N$99
  Bottom 0.203: Q1.3 23.77,33.66 23.04,32.93 R11.1
PIR_SENSE  (via drill 0.39, 0.5)
  Top 0.203: v20.86,37.62 20.86,42.93 19.05,44.73 19.05,56.33 v27.94,65.22
  Bottom 0.203: v20.86,37.62 19.89,36.65 19.89,32.56 21.03,31.42 U3.19 | v27.94,65.22 27.94,69.62 R14.2
  Bottom 0.406: R14.2 27.94,70.21 JP2.4 JP2.T4 JP2.3 JP2.T3
RESET  (via drill 0.5)
  Top 0.203: v32,11.04 32,13.39 SW7.P$2
  Bottom 0.203: 32,10.17 v32,11.04 | TP6.P$1 36.82,10.35 R1.1 35.71,9.3 C14.1
  Bottom 0.254: C14.1 35.22,9.16 U3.41 33.02,9.16 32,10.17
RXD0
  Bottom 0.203: U3.38 34.03,13.66 35.18,12.51 TP2.P$1
SCK  (via drill 0.5)
  Top 0.203: v35.56,27.3 35.56,29.72 30.1,35.18 30.1,38.48 v30.23,38.61
  Bottom 0.203: U3.30 33.92,25.66 v35.56,27.3 | v30.23,38.61 30.61,38.23 30.61,38.26 30.69,38.17 TFT1.17
SCL  (via drill 0.5)
  Top 0.203: v11.3,42.8 13.46,42.8 19.4,36.86 21.62,36.86 25.65,40.89 32.83,40.89 38.22,35.5 38.22,29.46 v38.1,29.34 39.24,29.34 42.44,26.14 42.42,16.26 43.18,15.49 43.18,7.33 44.19,6.32 44.19,5.15 44.7,4.64 45.15,4.64 45.4,4.38 45.4,3.22 | 45.4,3.22 46.23,4.05 U5.3 | U1.4 40.41,1.27 44.83,1.27 45.4,1.84 45.4,3.22
  Bottom 0.203: CONN1.4 7.24,45.39 R5.2 7.49,46.1 8.38,46.99 10.58,46.99 10.86,46.71 10.86,44.51 11.3,44.07 v11.3,42.8 | U3.27 36.77,30.16 37.59,29.34 v38.1,29.34
SDA  (via drill 0.5)
  Top 0.203: U1.3 41.17,2.62 42.65,4.1 44.41,4.1 U5.4 43.78,4.62 43.78,6.15 42.74,7.2 42.74,15.3 41.97,16.07 41.97,25.46 39.75,27.69 38.54,27.69 v38.26,27.97 37.26,28.96 37.26,29.59 37.82,30.15 37.82,35.34 32.66,40.49 25.82,40.49 21.79,36.46 19.17,36.46 14.1,41.53 v11.24,41.53
  Bottom 0.203: CONN1.3 7.17,44.39 R7.2 7.51,44.07 8.35,44.91 8.35,46.27 8.6,46.52 10.41,46.52 10.41,42.48 11.24,41.66 v11.24,41.53 | U3.28 34.94,28.66 35.27,28.98 37.24,28.98 v38.26,27.97
SPKR
  Bottom 0.203: 37.3,16 R13.2 | U3.36 33.59,16.6 33.99,16.6 35.05,17.65 36.46,17.65 Q4.1
  Bottom 0.254: Q4.1 37.3,16.74 37.3,16
TFT_CS  (via drill 0.5)
  Top 0.203: v31.36,38.61 31.36,35 35.97,30.39 35.97,27.97 36.32,27.62 36.32,25.98 v36.96,25.34
  Bottom 0.203: v31.36,38.61 31.19,38.43 TFT1.18 31.22,36.61 31.22,35.88 30.01,34.67 R4.2 | v36.96,25.34 37.28,25.34 38.12,24.5 38.12,20.21 37.92,20.02 33.88,20.02 U3.34
TFT_DC  (via drill 0.5)
  Top 0.203: v28.96,38.88 28.96,35.62 34.8,29.77 34.8,26.99 34.92,26.87 34.92,26.25 35.12,26.06 v35.56,26.06
  Bottom 0.203: TFT1.16 30.24,37.47 28.96,38.75 v28.96,38.88 | v35.56,26.06 35.88,25.74 35.88,25.08 36.47,24.49 36.86,24.49 37.72,23.63 37.72,20.7 37.49,20.47 34.59,20.47 33.9,21.16 U3.33
TFT_LEDK
  Bottom 0.203: TFT1.2 23.19,35.89 23.24,35.46 R11.2
TFT_LITE
  Bottom 0.203: U3.24 28.75,31.13 28.75,33.27 27.42,34.6 Q1.1 27.52,34.6 R10.2
TFT_RESET  (via drill 0.5)
  Top 0.203: v32.29,39.38 32.16,39.25 32.16,35.02 36.37,30.82 36.37,28.14 36.72,27.79 36.72,26.7 37.9,25.53 v38.22,25.53
  Bottom 0.203: TFT1.20 32.19,39.28 v32.29,39.38 | v38.22,25.53 38.53,25.21 38.53,19.98 38.16,19.61 35.3,19.61 33.85,18.16 U3.35
TXD0
  Bottom 0.203: U3.37 33.66,15.16 34.85,13.97 36.51,13.97 TP3.P$1
VBUS  (via drill 0.5)
  Top 0.254: v52.58,14.07 52.54,14.07 52.83,13.78 52.83,10.54 v53.34,10.03
  Bottom 0.203: 43.62,13.86 43.62,12.83 C15.1 43.71,12.83 R12.1
  Bottom 0.254: X4.A4B9 50.19,13.86 50.48,13.56 51.23,13.56 51.23,13.57 51.72,14.07 v52.58,14.07 | v53.34,10.03 53.34,9.65 52.29,8.6 51.7,8.6 50.93,9.37 50.55,9.37 50.29,9.12 49.72,9.12 X4.B4A9 | C1.1 46.76,13 46.15,13.6
  Bottom 0.406: X4.A4B9 48.44,13.86 47.58,13 C1.1 | Q3.2 43.62,13.86 45.84,13.86 46.1,13.6 46.15,13.6
VCC
  Bottom 0.406: SENSE3.2 4.45,12.8 4.45,22.73 | SENSE.2 6.4,22.99 4.7,22.99 4.45,22.73 | 4.45,22.73 4.45,29.24 | 4.45,29.24 4.45,33.78 | 4.45,33.78 5.45,34.79 SENSE1.2 | SJ2.2 4.45,29.24 | 4.45,33.78 3.3,34.92 3.3,36.7 5.33,38.73 8.51,38.73 8.67,38.57 C20.1
VHIGH  (via drill 0.5)
  Top 0.203: v7.67,30.47 7.67,27.7 7.74,27.62 7.74,26.99 7.57,26.82 7.57,12.76 7.87,12.46 14.03,12.46 17.47,9.02 36.32,9.02 38.45,11.14 38.45,13.43 v39.05,14.03 40.61,15.59 SP1.+
  Bottom 0.203: U4.3 41.8,14.24 Q3.3 40.47,14.03 | 40.47,14.03 39.9,13.47 U4.1 | D3.C 39.35,15.88 40.71,15.88 | v39.05,14.03 40.47,14.03 | v7.67,30.47 7.83,30.64 SJ2.1
  Bottom 0.406: Q3.3 40.71,15.34 40.71,15.88 40.71,16.33 40.5,16.54 C11.1

## Text on the board
214bmp: D:/SmartProjects/Snc/a4_bn_logo2.bmp